# Altium PCB VGA_6bits.PcbDoc
Units mm, origin at the board's own origin, x right, y up, seen from the top; angles counter-clockwise.
Board outline 32 x 26 mm, 2 copper layers (Component Side, Bottom Layer), stack 1.525 mm thick; 9 components, 14 nets, 57 pads, 2 vias.
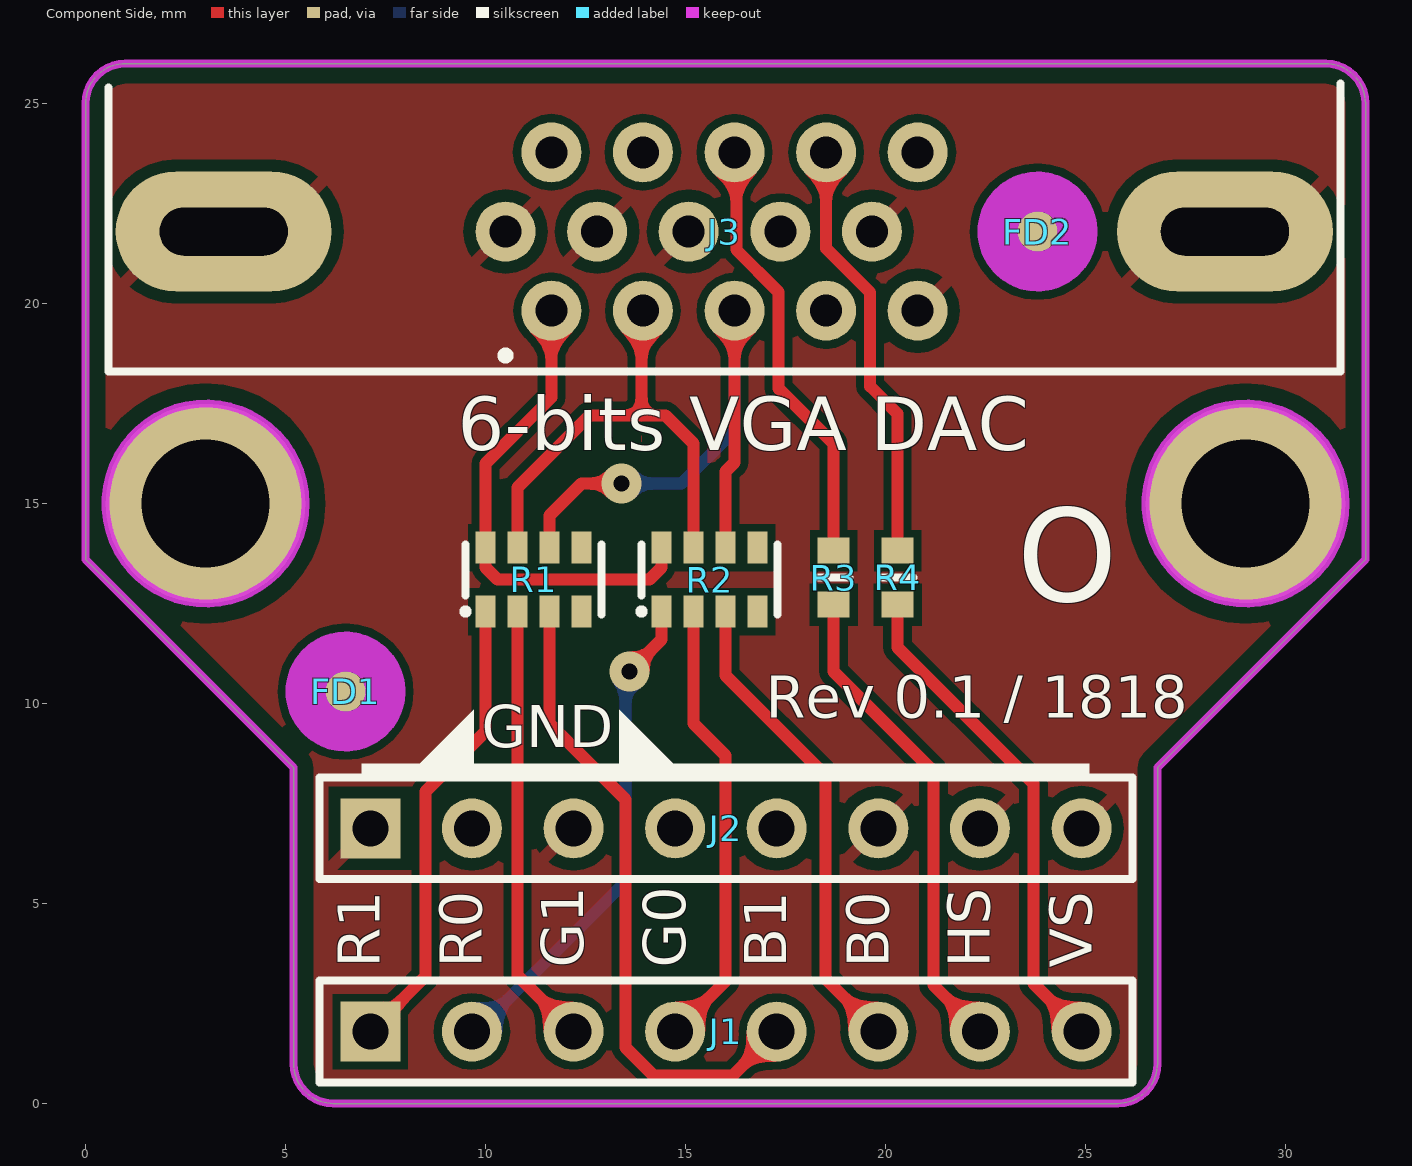
[diagram p0: Component Side view]
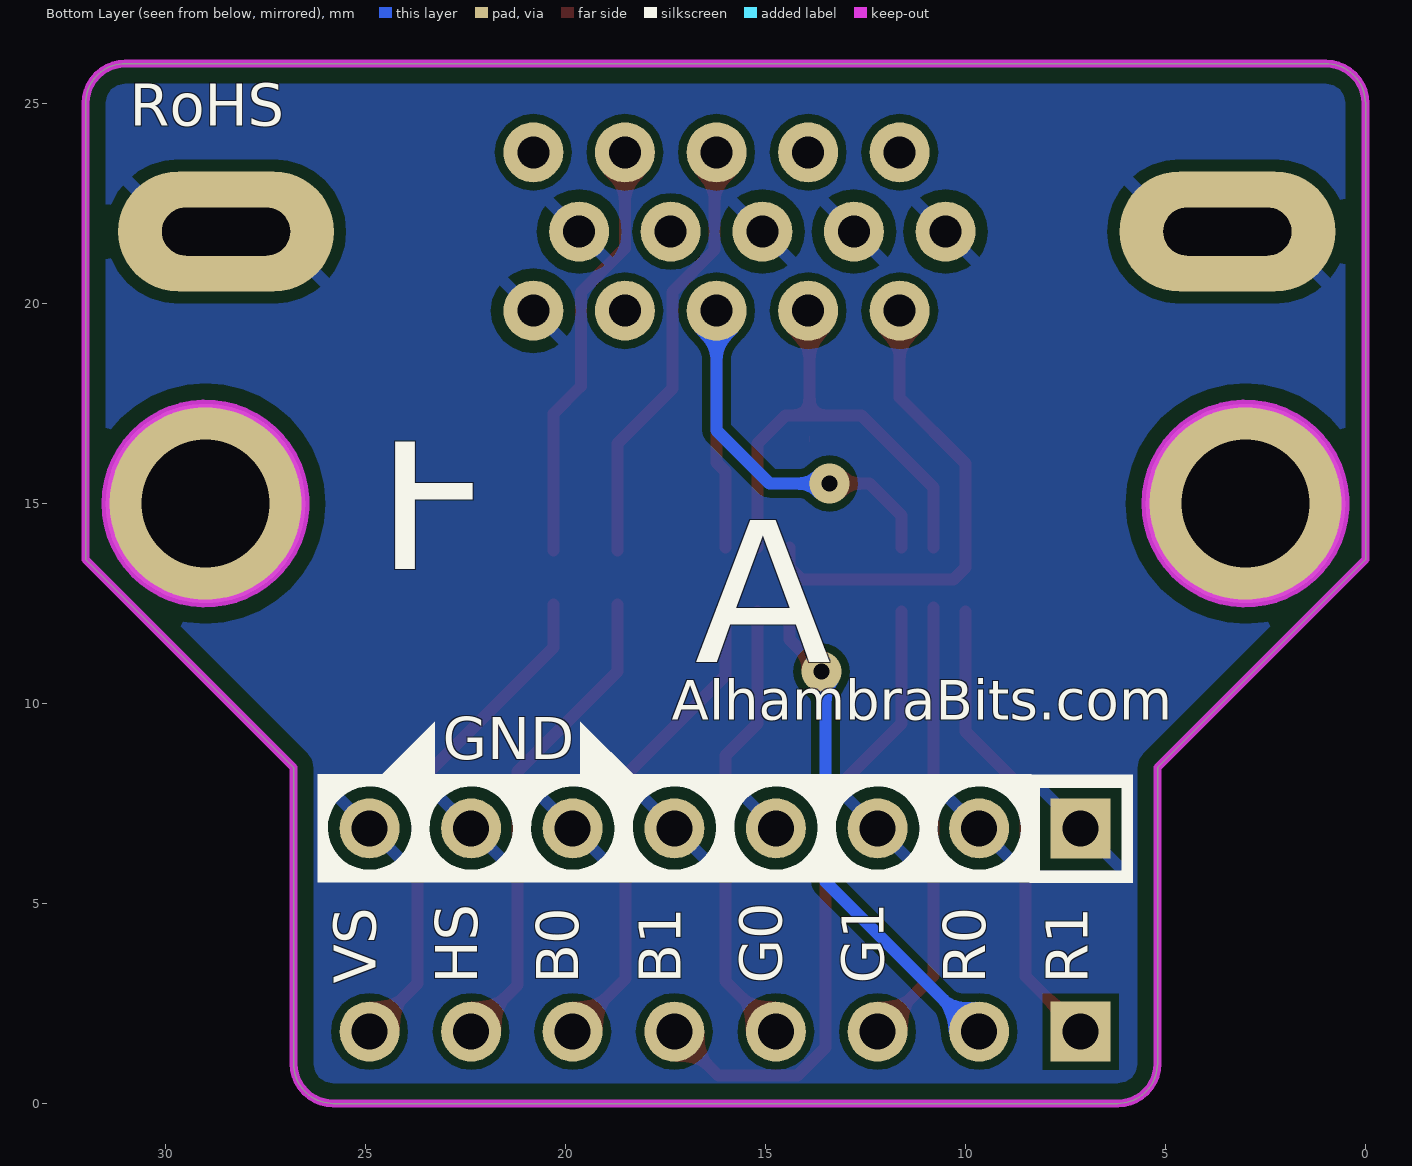
[diagram p1: Bottom Layer view, seen from below]
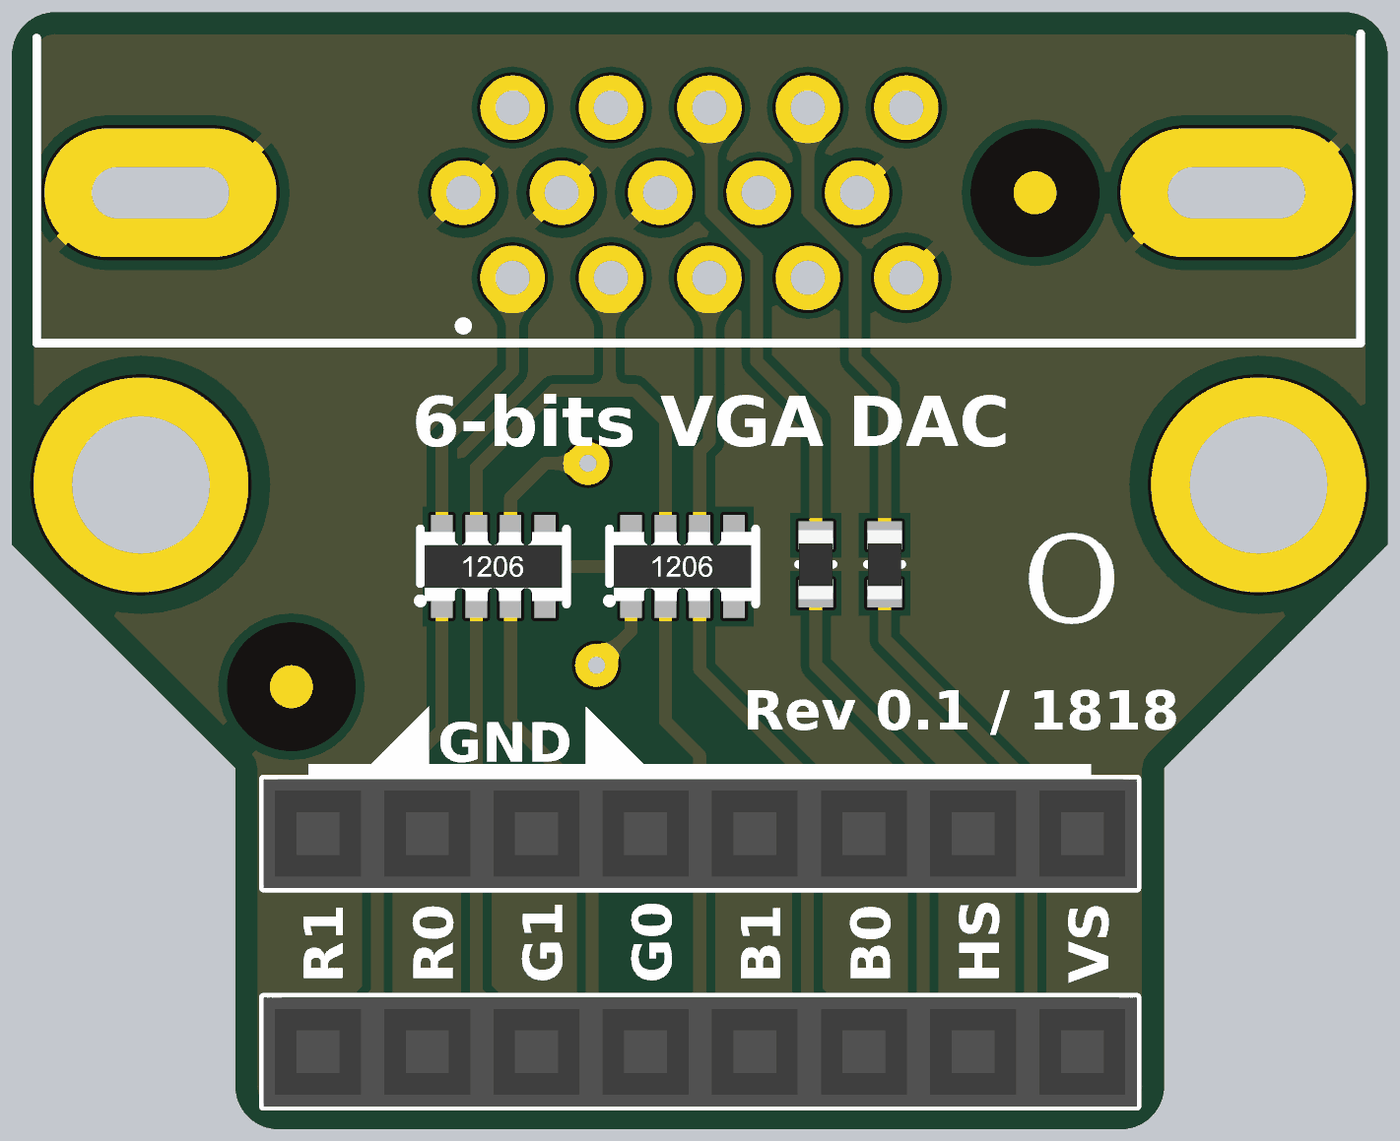
[diagram p2: 3D render of the assembled board from above, using the file's embedded part models]

## Layer stack, top to bottom
Top Solder: solder mask 0.0102, Solder Resist, Dk 3.5
Component Side: signal copper 0.0356
Dielectric 1: core 1.454, FR-4, Dk 4.2
Bottom Layer: signal copper 0.0356
Solder Side: solder mask 0.0102, Solder Resist, Dk 3.5

## Board outline
5.2,8.4 0,13.6 0,25 cw(c1,25) 1,26 31,26 cw(c31,25) 32,25 32,13.6 26.8,8.4 26.8,1 cw(c25.8,1) 25.8,0 6.2,0 cw(c6.2,1) 5.2,1

## Design rules (kind name [scope] priority, off if disabled: settings)
AssemblyTestPointUsage [InNetClass('Test Points')] p1: allowmultiple=TRUE
AssemblyTestpoint [InNetClass('Test Points')] p1: testpointundercomponent=TRUE minsize=0.6 maxsize=2 preferedsize=0.6 minholesize=0 maxholesize=0.3 preferedholesize=0.3 testpointgrid=0.025 usegrid=FALSE gridtolerance=0 allowsidetop=TRUE allowsidebottom=TRUE
Clearance Clearance_KO [OnLayer('Keep-Out Layer')] p1: gap=0.4 ignorepadtopadclearanceinfootprint=FALSE except(0: Arc-Hole Track-Hole SMDPad-Hole THPad-Hole Via-Hole Fill-Hole Poly-Hole Region-Hole Text-Hole)
Clearance [All] p2: gap=0.2 ignorepadtopadclearanceinfootprint=FALSE except(0: Arc-Hole Track-Hole SMDPad-Hole THPad-Hole Via-Hole Fill-Hole Poly-Hole Region-Hole Text-Hole)
DiffPairsRouting [All] p1: maxlimit=0.2 minlimit=0.2 mostfreqgap=0.2 toplayer_minwidth=0.2 toplayer_maxwidth=0.2 toplayer_prefwidth=0.2 bottomlayer_minwidth=0.2 bottomlayer_maxwidth=0.2 bottomlayer_prefwidth=0.2 maxuncoupledlength=12.7
FabricationTestPointUsage [All] p1 off: valid=0 allowmultiple=FALSE
FabricationTestpoint [All] p1 off: side=3 testpointundercomponent=TRUE minsize=1.016 maxsize=2.54 preferedsize=1.524 minholesize=0 maxholesize=1.016 preferedholesize=0.813 testpointgrid=0.025 allowsidetop=TRUE allowsidebottom=TRUE usegrid=TRUE gridtolerance=0
FanoutControl Fanout_BGA [IsBGA] p1 off: bgadir=Out bgaviamode=Centered fanoutstyle=Auto fanoutdirection=Alternating viagrid=0.025 // Fanout_BGA (Default Rule)
FanoutControl Fanout_LCC [IsLCC] p2 off: bgadir=Out bgaviamode=Centered fanoutstyle=Auto fanoutdirection=Alternating viagrid=0.025 // Fanout_LCC (Default Rule)
FanoutControl Fanout_SOIC [IsSOIC] p3 off: bgadir=Out bgaviamode=Centered fanoutstyle=Auto fanoutdirection=Alternating viagrid=0.025 // Fanout_SOIC (Default Rule)
FanoutControl Fanout_Small [(CompPinCount < 5)] p4 off: bgadir=Out bgaviamode=Centered fanoutstyle=Auto fanoutdirection=OutThenIn viagrid=0.025 // Fanout_Small (Default Rule)
FanoutControl Fanout_Default [All] p5 off: bgadir=Out bgaviamode=Centered fanoutstyle=Auto fanoutdirection=Alternating viagrid=0.025 // Fanout_Default (Default Rule)
Height [All] p1 off: minheight=0 maxheight=25.4 prefheight=12.7
HoleSize [All] p1: absolutevalues=TRUE maxlimit=3.6 minlimit=0.3 maxpercent=80.000 minpercent=20.000
HoleToHoleClearance [All] p1: gap=0.25 allowstackedmicrovias=TRUE
MinimumAnnularRing [All] p1: minimumring=0.15
MinimumAnnularRing OnlyTMBVias [(ObjectKind = 'Via') And (PadStackMode <> 'Top-Middle-Bottom')] p2: minimumring=10
MinimumAnnularRing ViaHoleSize [(ObjectKind = 'Via') And (PadStackMode = 'Top-Middle-Bottom') and (AsMM(HoleDiameter) <> 0.4) and (AsMM(HoleDiameter) <> 0.3)] p3: minimumring=10
MinimumAnnularRing MinimumAnnularRing_04 [(ObjectKind = 'Via') And (AsMM(HoleDiameter) = 0.4) And (PadStackMode = 'Top-Middle-Bottom') And ((AsMM(PadXSize_TopLayer) < 0.74) Or (AsMM(PadXSize_MidLayer1) < 0.84) Or (AsMM(PadXSize_BottomLayer) < 0.74) )] p4: minimumring=10
MinimumAnnularRing MinimumAnnularRing_03 [(ObjectKind = 'Via') And (AsMM(HoleDiameter) = 0.3) And (PadStackMode = 'Top-Middle-Bottom') And ((AsMM(PadXSize_TopLayer) < 0.64) Or (AsMM(PadXSize_MidLayer1) < 0.74) Or (AsMM(PadXSize_BottomLayer) < 0.64) )] p5: minimumring=10
MinimumSolderMaskSliver [All] p1 off: minsoldermaskwidth=0.1
NetAntennae [All] p1 off: netantennaetolerance=20
PlaneConnect [All] p1: planeconnectstyle=Relief reliefexpansion=0.508 reliefentries=2 reliefconductorwidth=0.3 reliefairgap=0.4
PolygonConnect PolygonConnect_NoTh [InPolygonClass('pcNoThermals')] p1: connectstyle=Direct reliefconductorwidth=0.254 reliefentries=4 polygonreliefangle="90 Angle" airgapwidth=0.254
PolygonConnect PolygonConnect_NoThVias [IsVia] p2: connectstyle=Direct reliefconductorwidth=0.254 reliefentries=4 polygonreliefangle="90 Angle" airgapwidth=0.254
PolygonConnect [All] p3: connectstyle=Relief reliefconductorwidth=0.3 reliefentries=2 polygonreliefangle="45 Angle" airgapwidth=0.3
RoutingPriority [All] p1 off: routingpriority=0
RoutingTopology [All] p1 off: topology=Shortest
RoutingVias [All] p1: holewidth=0.3 width=0.6 viastyle="Through Hole" minholewidth=0.3 minwidth=0.6 maxholewidth=0.8 maxwidth=1.2
SilkToSilkClearance [All] p1 off: silktosilkclearance=0
SilkToSolderMaskClearance [IsPad] p1 off: minsilkscreentomaskgap=0 clearancetoexposedcopper=TRUE
SolderMaskExpansion Via_Tenting_Top [(ObjectKind = 'Via') And (TestpointAssyTop = 'False') And (TestpointAssyBottom = 'True')] p1: expansion=-2 useseparateexpansions=TRUE expansionbottom=0.075
SolderMaskExpansion Via_Tenting_Bottom [(ObjectKind = 'Via') And (TestpointAssyTop = 'True') And (TestpointAssyBottom = 'False')] p2: expansion=0.075 useseparateexpansions=TRUE expansionbottom=-2
SolderMaskExpansion Via_Tenting_TopBot [(ObjectKind = 'Via') And (TestpointAssyTop = 'False') And (TestpointAssyBottom = 'False') And (Locked = 'False')] p3: expansion=-2
SolderMaskExpansion [All] p4: expansion=0.075
Width [All] p1: maxlimit=4 minlimit=0.2 preferedwidth=0.2
10 further rules are at their usual default settings.

## Components (designator, comment, footprint, x,y, rotation, side; value= is the part's Value field where it differs from the comment)
FD1 "Fiducial" Fiducial_1mm 6.5,10.3 r0 top
FD2 "Fiducial" Fiducial_1mm 23.8,21.8 r0 top
J1 "1x8 Socket Header 2.54mm" "1x8 Socket Header THT 2.54mm" 7.12,1.8 r0 top locked value=8
J2 "1x8 Socket Header 2.54mm" "1x8 Socket Header THT 2.54mm" 7.12,6.88 r0 top locked value=8
J3 "VGA_Socket" VGA_RA_SLIM 11.645,19.82 r0 top locked
R1 "470R ±5% 0,0625W" 4xArray_1206_Convex 11.2,13.1 r0 top
R2 "1K ±5% 0,0625W" 4xArray_1206_Convex 15.6,13.1 r0 top
R3 "Resistor" R0603 18.7,13.15 r90 top value="100R ±1% 0.1W"
R4 "Resistor" R0603 20.3,13.15 r90 top value="100R ±1% 0.1W"

## Footprints (in the part's own frame and the unit in brackets; to place one, negate y for a bottom-side part, rotate by r counter-clockwise, add the part's x,y. Pads: shape width x height; smd on the part's side, far side on the other; paste and mask are expansions set on the pad)
"1x8 Socket Header THT 2.54mm" [mm] "8 Socket Header pitch 2.54mm"
  rect 1.5x1.5 hole 0.9: 1(0,0)
  round 1.5 hole 0.9: 2(2.54,0) 3(5.08,0) 4(7.62,0) 5(10.16,0) 6(12.7,0) 7(15.24,0) 8(17.78,0)
  silkscreen extent -1.27,-1.27 19.05,1.27, body extent -1.27,-1.27 19.05,1.27, height 8.3
4xArray_1206_Convex [mm] "4x array, 1206, Convex"
  rect 0.5x0.8 smd: 1(-1.2,-0.8) 2(-0.4,-0.8) 3(0.4,-0.8) 4(1.2,-0.8) 5(1.2,0.8) 6(0.4,0.8) 7(-0.4,0.8) 8(-1.2,0.8)
  silkscreen extent -1.75,-0.87 1.7,0.88, body extent -1.6,-0.8 1.6,0.8, height 0.52
Fiducial_1mm [mm] "Marcas Fiduciales para montador"
  round 1 smd paste-2 mask+1: ""(0,0)
  Component Side keep-out circle w1: c0,0 r1
R0603 [mm] "Chip Resistor, Body 1.6x0.8mm, IPC High Density"
  rect 0.65x0.8 smd: 1(-0.675,0) 2(0.675,0)
  silkscreen extent 0,-0.4 0,0.4, body extent -0.81,-0.4 0.79,0.4, height 0.4
VGA_RA_SLIM [mm] "VGA Socket RA, Slim"
  round 1.5 hole 0.8: 1(0,0) 2(2.29,0) 3(4.58,0) 4(6.87,0) 5(9.16,0) 6(-1.145,1.98) 7(1.145,1.98) 8(3.435,1.98) 9(5.725,1.98) 10(8.015,1.98) 11(0,3.96) 12(2.29,3.96) 13(4.58,3.96) 14(6.87,3.96) 15(9.16,3.96)
  oval 5.4x3 hole 1.2 slot 3.2 at 0 deg: 16(-8.19,1.98) 17(16.84,1.98)
  silkscreen extent -11.07,-1.52 19.73,5.68, body extent -10.82,-1.07 19.98,12.4, height 11.25

## Part data
FD1 FD2: library part "Fiducial 1mm", "Fiducial Mark", Part Number="Fiducial 1mm"
J1 J2: library part CON_SH_THT2.54_8, "Connector, 8 pin Socket Header 2.54mm", Manufacturer=Samtec, Manufacturer 2="Würth Elektronik", Temp_ Max=125, Temp_ Min=-40, OrderingCode=SSW-108-01-T-S, OrderingCode 2="613 008 118 21", Part Number=CON_SH_THT2.54_8, Pitch=2.54mm, Price (€)=0,438, Supplier=Samtec
J3: library part VGA_RA_SLIM, OrderingCode="VGA Socket RA", Part Number=VGA_RA_SLIM
R1: library part 4xArray_1206_Convex_470R_0,0625W_±5%, "Resistor", Manufacturer=Yageo, Power=0,0625W, Resistance=470R, Temp_ Max=155, Temp_ Min=-25, Tolerance=±5%, OrderingCode=YC164-JR-07470RL, PackageDescription=SMD, Part Number=4xArray_1206_Convex_470R_0,0625W_±5%, Price (€)=0,006
R2: library part 4xArray_1206_Convex_1K_0,0625W_±5%, "Resistor", Manufacturer=Yageo, Power=0,0625W, Resistance=1K, Temp_ Max=155, Temp_ Min=-25, Tolerance=±5%, OrderingCode=YC164-JR-071KL, PackageDescription=SMD, Part Number=4xArray_1206_Convex_1K_0,0625W_±5%, Price (€)=0,005
R3 R4: library part R0603_100R_0.1W_±1%, "Resistor, SMD", Manufacturer=Vishay, Power=0.1W, Resistance=100R, Temp_ Max=155, Temp_ Min=-55, Tolerance=±1%, OrderingCode=CRCW0603100RFK, PackageDescription=SMD, Part Number=R0603_100R_0.1W_±1%, Price (€)=0,014

## Free pads (board coordinates)
  round 5 hole 3.2: 0(3,15) 0(29,15)

## Via types
v1: diameter 1, hole 0.4, Component Side to Bottom Layer, 2 vias

## Nets (pads, with @x,y where several pads share a name; then routed paths per layer and width w, separated by ;. In a path a pad name is that pad's centre, name@x,y a point inside that pad or via, vN(x,y) a via of type N, cw(c..) or ccw(c..) an arc to the next point about the centre after c; other vN are vias at no path point)
B0: J1.6 R2.3 | length 12.1
  Component Side w0.3: R2.3 16,10.7 18.5,8.2 18.5,3.12 J1.6
B1: J1.5 R1.3 | length 16.2
  Component Side w0.3: R1.3 11.6,9.5 13.5,7.6 13.5,1.4 14.2,0.7 16.18,0.7 J1.5
G0: J1.4 R2.2 | length 11.4
  Component Side w0.3: J1.4 16,3.06 16,8.7 15.2,9.5 R2.2
G1: J1.3 R1.2 | length 11.2
  Component Side w0.3: R1.2@10.8,12.4 10.8,3.2 J1.3
GND: J2.1 J2.2 J2.3 J2.4 J2.5 J2.6 J2.7 J2.8 J3.5 J3.6 J3.7 J3.8 J3.10 J3.16 J3.17
HSYNC: J1.7 R3.1 | length 12.2
  Component Side w0.3: R3.1 18.7,10.8 21.2,8.3 21.2,2.96 J1.7
NetJ3_1: J3.1 R1.8 R2.8 | length 12.2
  Component Side w0.3: J3.1 11.645,17.645 10,16 R1.8 10,13.4 10.3,13.1 14.1,13.1 14.4,13.4 R2.8
NetJ3_2: J3.2 R1.7 R2.7 | length 12.2
  Component Side w0.3: R1.7 10.8,15.4 12.6,17.2 13.9,17.2 ; J3.2 13.9,19.785 13.9,17.2 ; R2.7 15.2,16.5 14.5,17.2 13.9,17.2
NetJ3_3: J3.3 R1.6 R2.6 | length 15.3
  Component Side w0.3: R1.6 11.6,14.7 12.4,15.5 v1(13.4,15.5) ; R2.6 16,15.8 16.225,16.025 J3.3 J3.3@16.2,19.795
  Bottom Layer w0.3: v1(13.4,15.5) 14.9,15.5 16.225,16.825 J3.3
NetJ3_13: J3.13 R3.2 | length 11
  Component Side w0.3: J3.13 16.27,23.735 16.27,21.344 17.325,20.289 17.325,17.875 18.7,16.5 R3.2
NetJ3_14: J3.14 R4.2 | length 10.7
  Component Side w0.3: J3.14 18.515,21.376 19.615,20.276 19.615,17.93 20.3,17.245 R4.2
R0: J1.2 R2.1 | length 12.6
  Component Side w0.3: v1(13.6,10.8) 14.4,11.6 R2.1
  Bottom Layer w0.3: J1.2@9.66,1.7 13.5,5.54 13.5,10.7 v1(13.6,10.8)
R1: J1.1 R1.1 | length 11.7
  Component Side w0.3: J1.1 8.5,3.18 8.5,7.8 10,9.3 R1.1
VSYNC: J1.8 R4.1 | length 12.6
  Component Side w0.3: R4.1 20.3,11.4 23.7,8 23.7,3 J1.8
pads on no net: FD1. FD2. J3.4 J3.9 J3.11 J3.12 J3.15 R1.4 R1.5 R2.4 R2.5

## Polygon pours and split planes (outlines as drawn)
GND on Component Side "SW_RESET" (solid, remove dead copper, pour order 0): 0,0 33,0 33,27 0,27
GND on Bottom Layer "SW_RESET" (solid, remove dead copper, pour order 4): 0,0 33,0 33,27 0,27

## Keep-outs
Keep-Out Layer:
  circle w0.2: c3,15 r2.5
  circle w0.2: c29,15 r2.5
  lines w0.2: 0,13.6 5.2,8.4 5.2,1 ccw(c6.2,1) 6.2,0 25.8,0 ccw(c25.8,1) 26.8,1 26.8,8.4 32,13.6 32,25 ccw(c31,25) 31,26 1,26 ccw(c1,25) 0,25 0,13.6

## Silkscreen, mask and mechanical layers (free items; w line width, h text height)
Top Overlay:
  rectangle: 6.9,8.15 25.1,8.5
  region: 8.2,8.35 9.7,8.35 9.7,9.85
  region: 13.344,9.85 14.849,8.345 13.344,8.345
  text "6-bits VGA DAC" at 9.3,15.9 h2.3
  text "O" at 25.8,11.8 h4
  text "Rev 0.1 / 1818" at 17,9.3 h1.8
  text "GND" at 9.9,8.554 h1.8
  text "R1" at 7.7,3.4 h1.8 r90
  text "R0" at 10.254,3.4 h1.8 r90
  text "G1" at 12.797,3.4 h1.8 r90
  text "G0" at 15.34,3.4 h1.8 r90
  text "B1" at 17.872,3.4 h1.8 r90
  text "B0" at 20.426,3.4 h1.8 r90
  text "HS" at 22.957,3.4 h1.8 r90
  text "VS" at 25.5,3.4 h1.8 r90
Bottom Overlay:
  region: 23.6,5.53 26.2,5.53 26.2,8.23 23.6,8.23 23.6,6.83 23.85,6.83 23.85,6.916 cw(c24.901,6.877) 25.94,7.043 25.945,6.83 cw(c24.898,6.892) 23.85,6.83 23.6,6.83
  region: 21.06,5.53 23.66,5.53 23.66,8.23 21.06,8.23 21.06,6.83 21.31,6.83 21.31,6.916 cw(c22.361,6.877) 23.4,7.043 23.405,6.83 cw(c22.358,6.892) 21.31,6.83 21.06,6.83
  region: 18.52,5.53 21.12,5.53 21.12,8.23 18.52,8.23 18.52,6.83 18.77,6.83 18.77,6.916 cw(c19.821,6.877) 20.86,7.043 20.865,6.83 cw(c19.818,6.892) 18.77,6.83 18.52,6.83
  region: 15.98,5.53 18.58,5.53 18.58,8.23 15.98,8.23 15.98,6.83 16.23,6.83 16.23,6.916 cw(c17.281,6.877) 18.32,7.043 18.325,6.83 cw(c17.278,6.892) 16.23,6.83 15.98,6.83
  region: 13.44,5.53 16.04,5.53 16.04,8.23 13.44,8.23 13.44,6.83 13.69,6.83 13.69,6.916 cw(c14.741,6.877) 15.78,7.043 15.785,6.83 cw(c14.738,6.892) 13.69,6.83 13.44,6.83
  region: 10.9,5.53 13.5,5.53 13.5,8.23 10.9,8.23 10.9,6.83 11.15,6.83 11.15,6.916 cw(c12.201,6.877) 13.24,7.043 13.245,6.83 cw(c12.198,6.892) 11.15,6.83 10.9,6.83
  region: 8.36,5.53 10.96,5.53 10.96,8.23 8.36,8.23 8.36,6.83 8.61,6.83 8.61,6.916 cw(c9.661,6.877) 10.7,7.043 10.705,6.83 cw(c9.658,6.892) 8.61,6.83 8.36,6.83
  region: 19.627,9.55 18.122,8.045 19.627,8.045
  region: 24.771,8.05 23.271,8.05 23.271,9.55
  region: 8.4,8.225 5.825,8.225 5.825,5.525 8.4,5.525 8.4,7.2 8.15,7.2 8.15,5.825 6.1,5.825 6.1,7.9 8.15,7.9 8.15,7.2 8.4,7.2
  text "RoHS" at 30.9,24.1 h1.8
  text "F" at 24.75,11.85 h8
  text "A" at 16.775,9.525 h8
  text "AlhambraBits.com" at 17.35,9.275 h1.7
  text "GND" at 23.071,8.254 h1.8
  text "R1" at 6.6,3 h1.8 r270
  text "R0" at 9.154,3 h1.8 r270
  text "G1" at 11.697,3 h1.8 r270
  text "G0" at 14.24,3 h1.8 r270
  text "B1" at 16.772,3 h1.8 r270
  text "B0" at 19.326,3 h1.8 r270
  text "HS" at 21.857,3 h1.8 r270
  text "VS" at 24.4,3 h1.8 r270
Mechanical 1:
  the board outline again, w0.2
Route tool:
  lines w1.6: 1,26.8 ccw(c1,25) -0.8,25 -0.8,14.9 -0.8,13.6 -0.8,13.275 4.4,8.075 4.4,1 ccw(c6.2,1) 6.2,-0.8 25.8,-0.8 ccw(c25.8,1) 27.6,1 27.6,8.075 32.8,13.275 32.8,13.6 32.8,14.9 32.8,25 ccw(c31,25) 31,26.8